# Altium PCB PCB1.PcbDoc
Units mm, origin at the board's own origin, x right, y up, seen from the top; angles counter-clockwise.
Board outline 100 x 100 mm, 2 copper layers (Top Layer, Bottom Layer); 23 components, 23 nets, 154 pads, 0 vias.
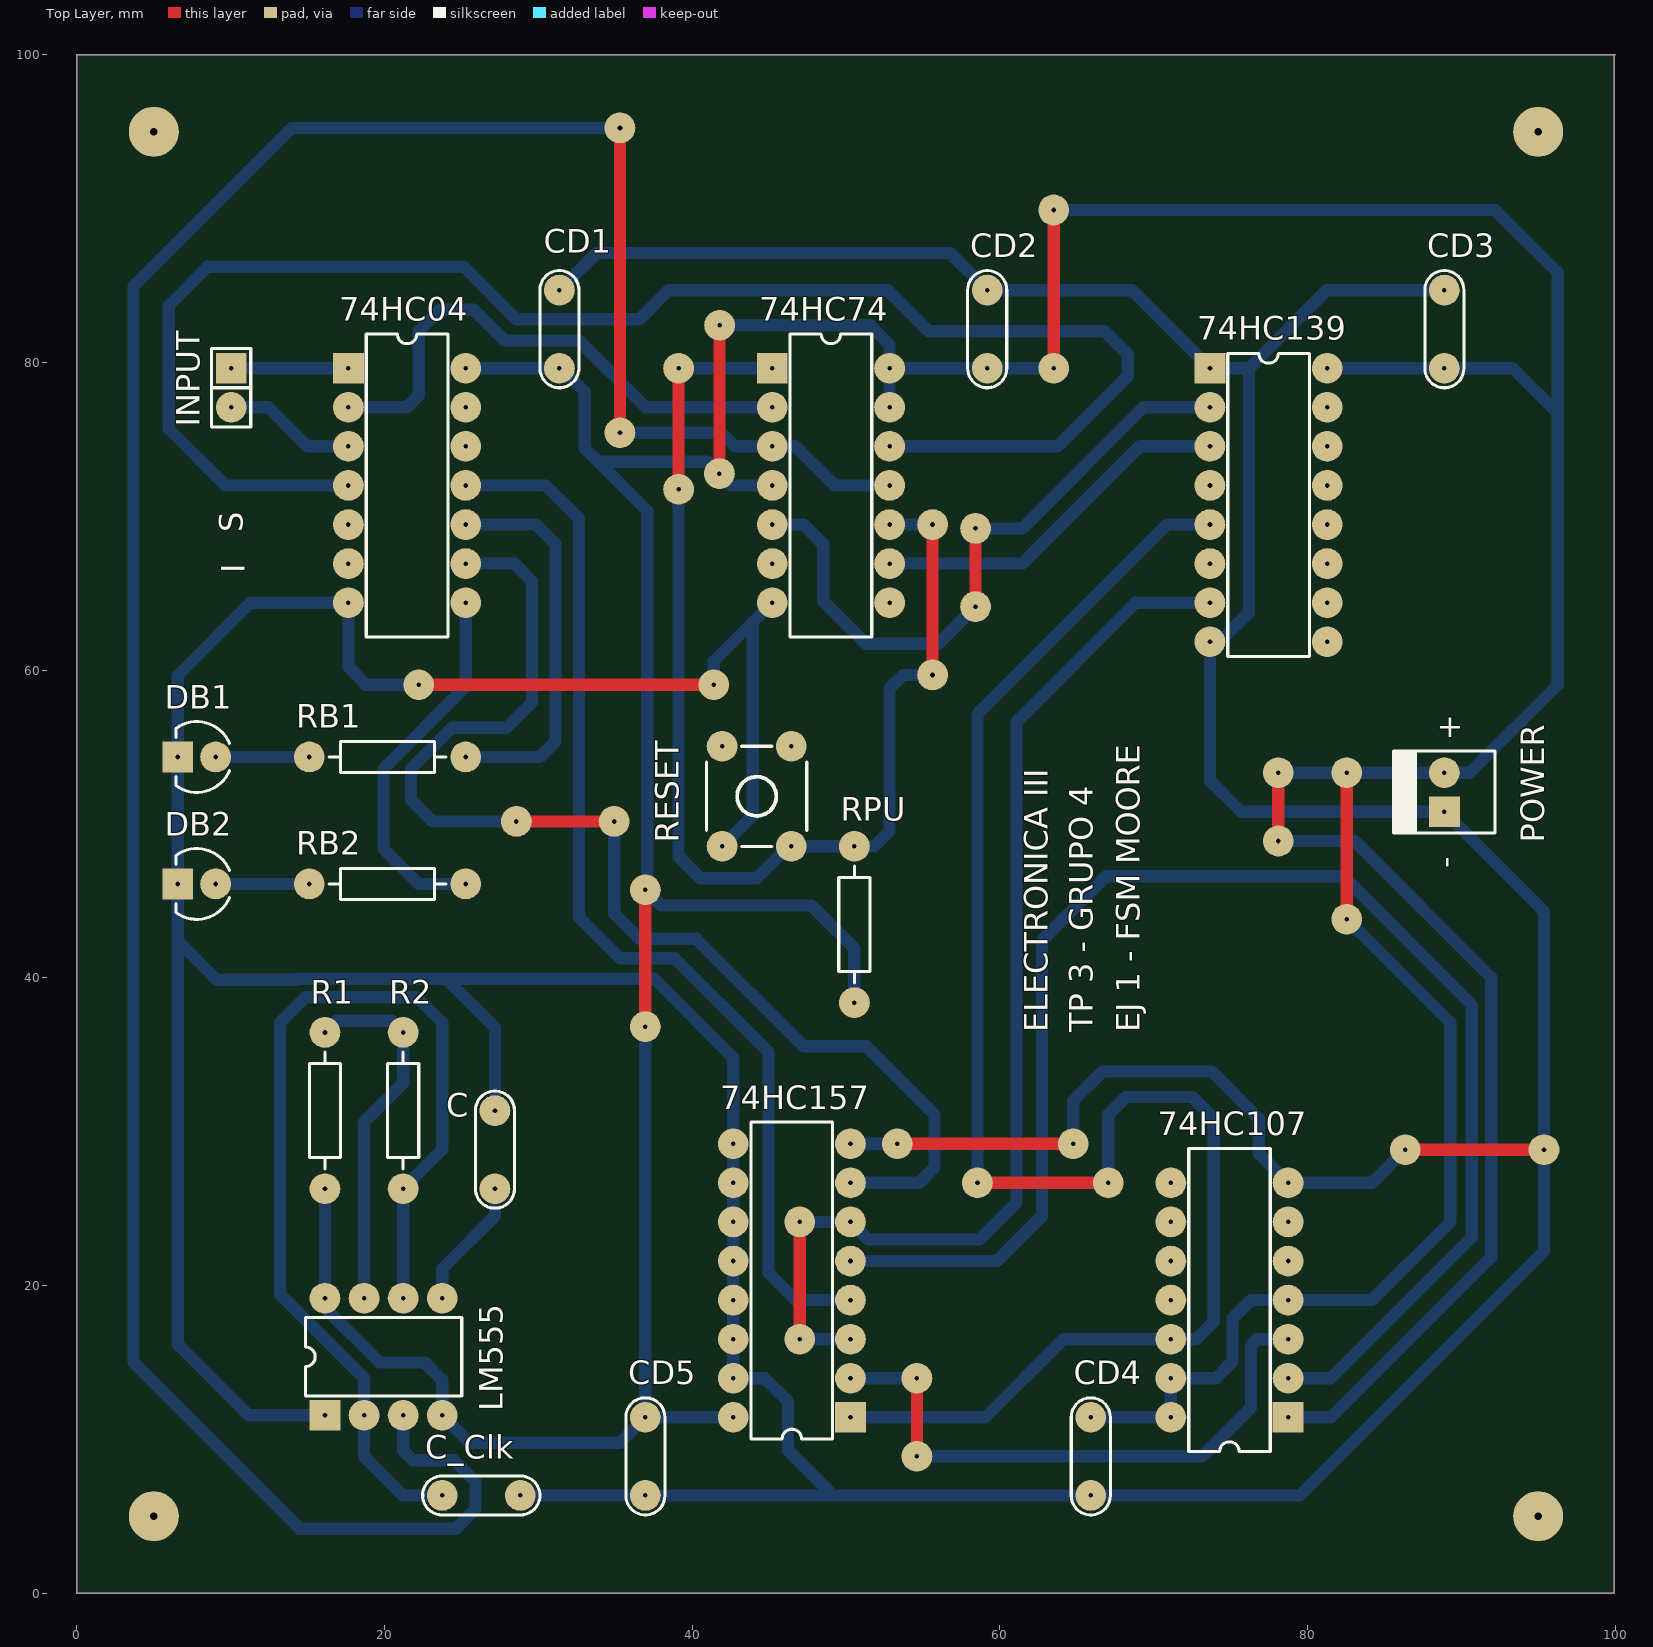
[diagram p0: Top Layer view]
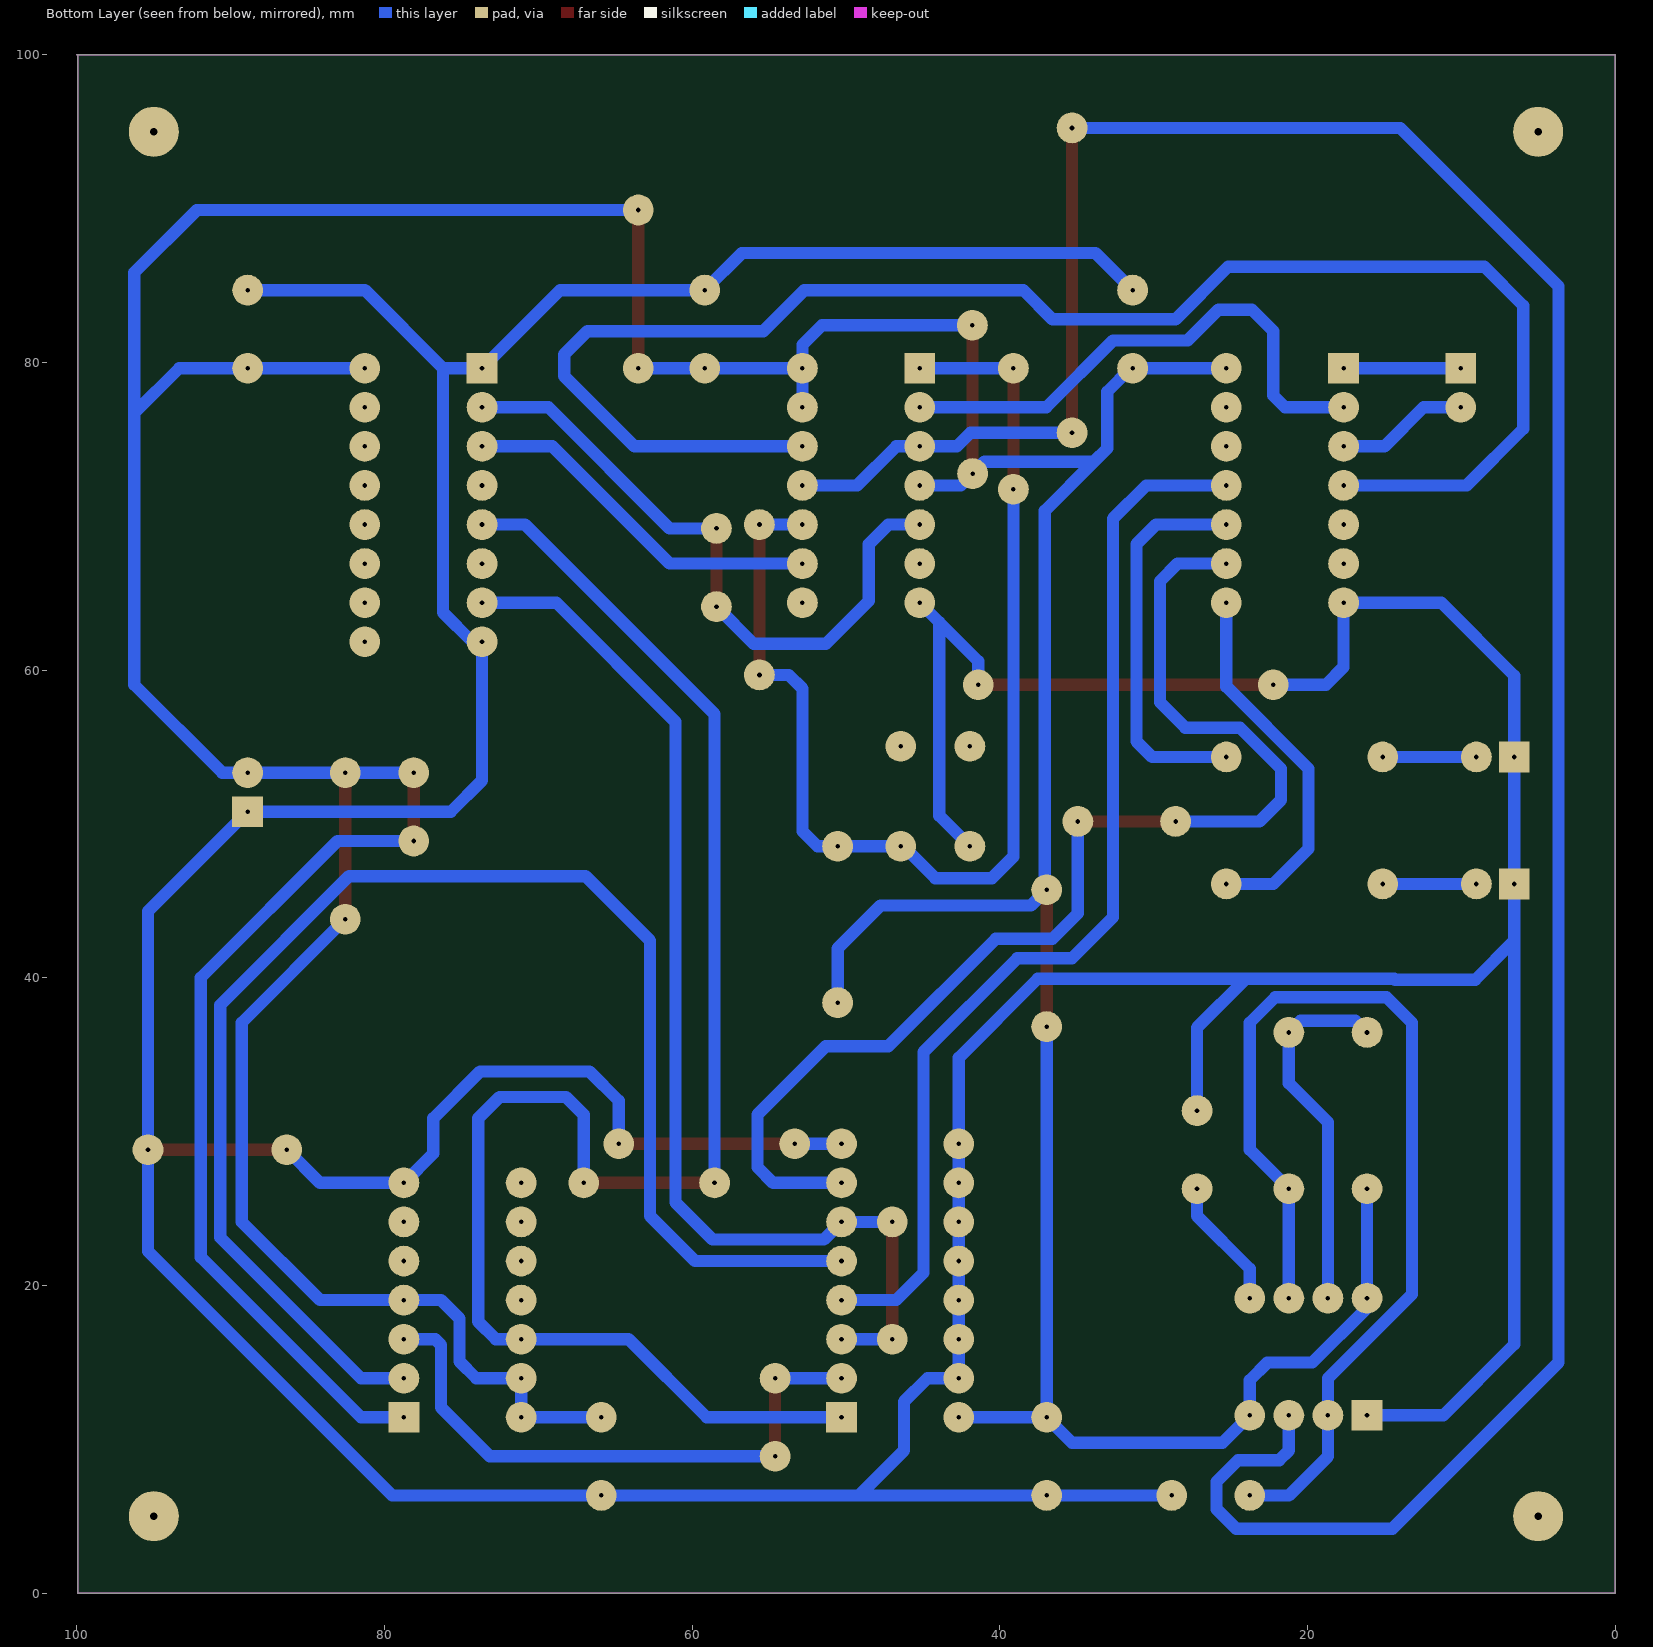
[diagram p1: Bottom Layer view, seen from below]
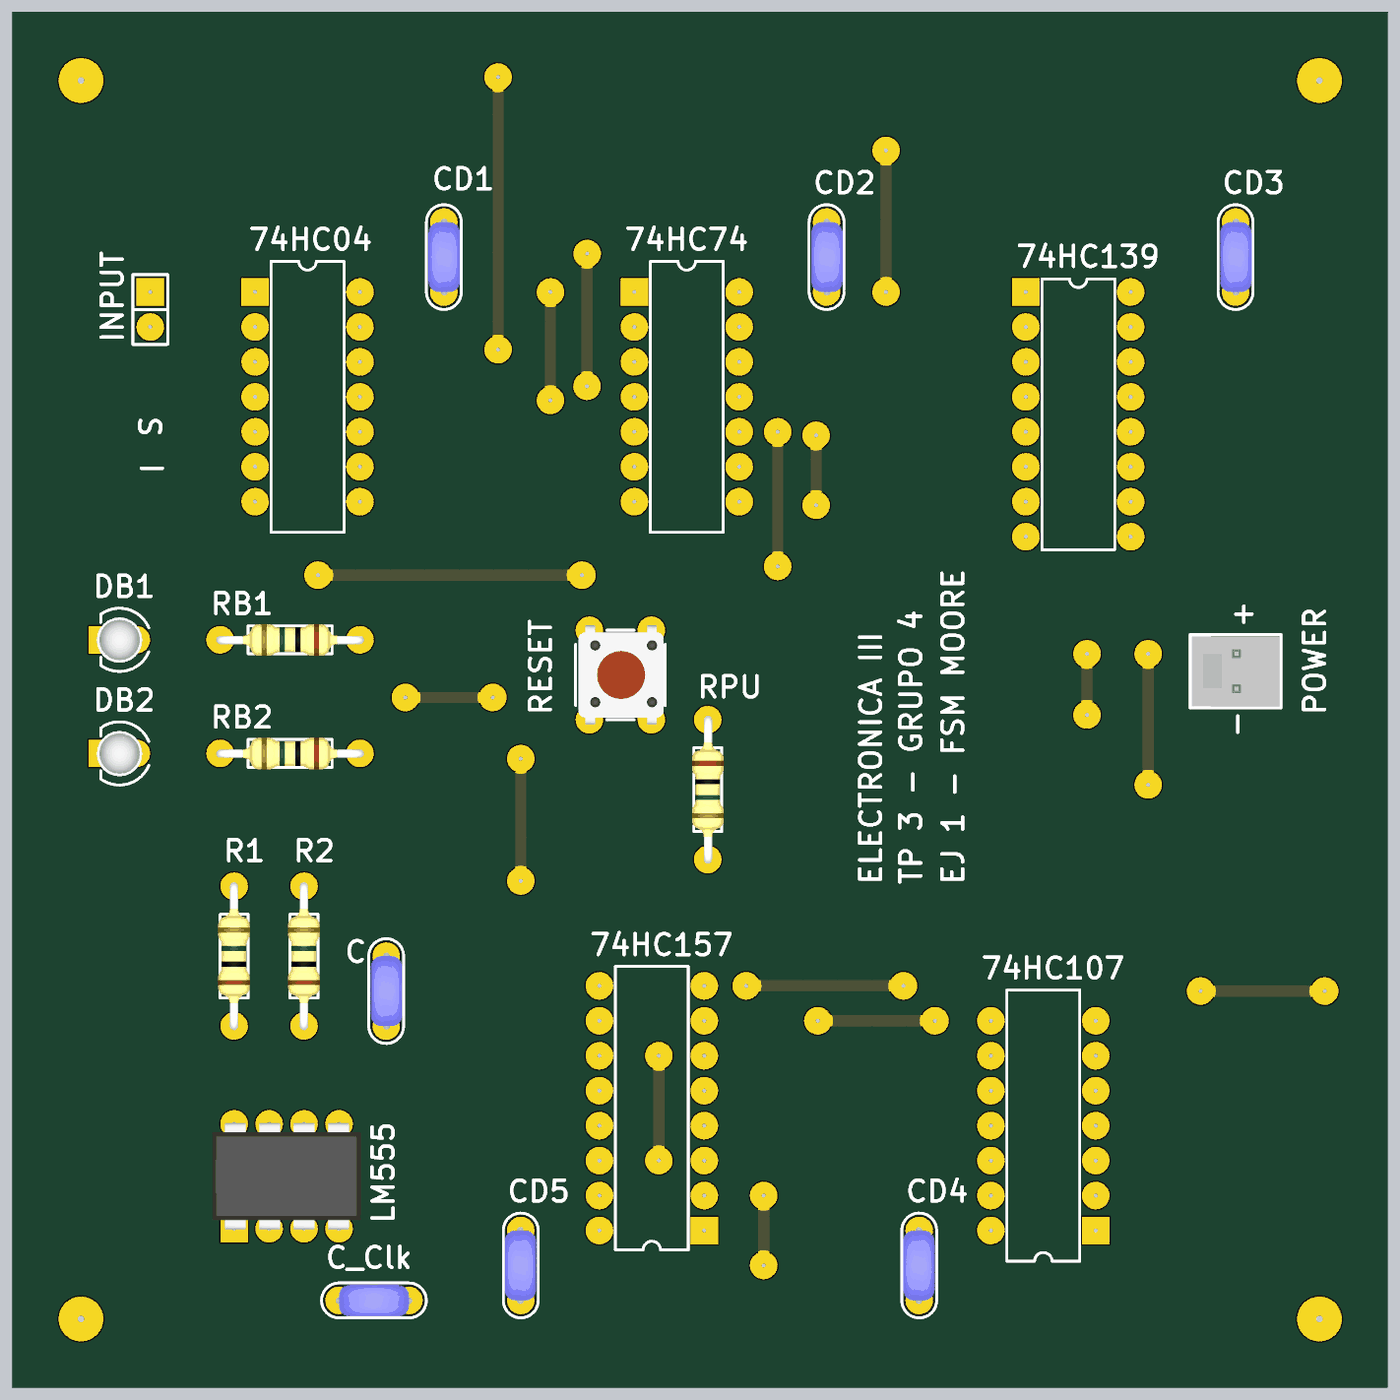
[diagram p2: 3D render of the assembled board from above, using the file's embedded part models]

## Layer stack, top to bottom
Top Solder: solder mask 0.0102, Solder Resist, Dk 3.5
Top Layer: signal copper 0.0356
Dielectric 1: dielectric 0.32, FR-4, Dk 4.8
Bottom Layer: signal copper 0.0356
Bottom Solder: solder mask 0.0102, Solder Resist, Dk 3.5

## Board outline
0,0 99.949,0 99.949,99.949 100,100 0,100

## Design rules (kind name [scope] priority, off if disabled: settings)
Clearance [All] p1: gap=0.4 ignorepadtopadclearanceinfootprint=FALSE
PolygonConnect [All] p1: connectstyle=Relief reliefconductorwidth=0.254 reliefentries=4 polygonreliefangle="90 Angle" airgapwidth=0.254
RoutingVias [All] p1: holewidth=0.3 width=2 viastyle="Through Hole" minholewidth=0.3 minwidth=1.5 maxholewidth=0.5 maxwidth=2
SolderMaskExpansion [All] p1: expansion=0.102
Width [All] p1: maxlimit=0.9 minlimit=0.6 preferedwidth=0.8
30 further rules are at their usual default settings.

## Components (designator, comment, footprint, x,y, rotation, side; value= is the part's Value field where it differs from the comment)
74HC04 "SN74AHC04N" N014 21.463,72.009 r270 top
74HC74 "SN74AHCT74N" N014 49.022,72.009 r270 top
74HC107 "SN74HC107N" N014D 74.93,19.05 r90 top
74HC139 "SN74HC139N" N016 77.47,70.739 r270 top
74HC157 "SN54HC157J" J016 46.482,20.32 r90 top
C "CAP" CAP200 27.178,28.829 r90 top
C_Clk "CAP" CAP200 26.289,6.35 r0 top
CD1 "CAP" CAP200 31.369,82.169 r90 top
CD2 "CAP" CAP200 59.182,82.169 r90 top
CD3 "CAP" CAP200 88.9,82.169 r90 top
CD4 "CAP" CAP200 65.913,8.89 r270 top
CD5 "CAP" CAP200 36.957,8.89 r270 top
DB1 "LED" LED3 7.798,54.356 r180 top
DB2 "LED" LED3 7.798,46.101 r180 top
INPUT "CON2" SIP2 10.033,78.359 r270 top
LM555 "LM555" DIP8 16.129,11.557 r90 top
POWER "MOLEX2" MOLEX2 88.9,50.8 r90 top
R1 "RES" RES400 16.129,26.289 r90 top
R2 "RES" RES400 21.209,26.289 r90 top
RB1 "RES" RES400 25.273,54.356 r180 top
RB2 "RES" RES400 25.273,46.101 r180 top
RESET "TACT SWITCH" TACTSWITCH 44.196,51.8 r0 top
RPU "RES" RES400 50.546,48.55 r270 top

## Footprints (in the part's own frame and the unit in brackets; to place one, negate y for a bottom-side part, rotate by r counter-clockwise, add the part's x,y. Pads: shape width x height; smd on the part's side, far side on the other; paste and mask are expansions set on the pad)
CAP200 [mm]
  round 2 hole 0.3: 1(-2.54,0) 2(2.54,0)
  silkscreen extent -3.81,-1.27 3.81,1.27, body extent -2.79,-1.17 2.79,1.12, height 6.24
DIP8 [mm]
  rect 2x2 hole 0.3: 1(0,0)
  round 2 hole 0.3: 2(0,-2.54) 3(0,-5.08) 4(0,-7.62) 5(7.62,-7.62) 6(7.62,-5.08) 7(7.62,-2.54) 8(7.62,0)
  silkscreen extent 1.27,-8.89 6.35,1.27, body extent -0.06,-9.21 7.7,1.59, height 4.5
J016 [mm] "DIP; 16 Leads; Row Spacing 7.62 mm; Pitch 2.54 mm"
  rect 2x2 hole 0.3: 1(-8.89,-3.81)
  round 2 hole 0.3: 2(-6.35,-3.81) 3(-3.81,-3.81) 4(-1.27,-3.81) 5(1.27,-3.81) 6(3.81,-3.81) 7(6.35,-3.81) 8(8.89,-3.81) 9(8.89,3.81) 10(6.35,3.81) 11(3.81,3.81) 12(1.27,3.81) 13(-1.27,3.81) 14(-3.81,3.81) 15(-6.35,3.81) 16(-8.89,3.81)
  silkscreen extent -10.3,-2.65 10.3,2.65
LED3 [mm]
  round 2 hole 0.3: 1(-1.219,0)
  rect 2x2 hole 0.3: 2(1.245,0)
  silkscreen extent -2.13,-2.3 1.36,2.3, body extent -1.65,-1.63 1.65,1.66, height 0.49
MOLEX2 [mm]
  rect 2x2 hole 0.3: 1(0,0)
  round 2 hole 0.3: 2(2.54,0)
  silkscreen extent -1.4,-3.3 3.94,3.3, body extent -1.27,-3.17 3.81,3.18, height 10.74
N014 [mm] "DIP; 14 Leads; Row Spacing 7.62 mm; Pitch 2.54 mm"
  rect 2x2 hole 0.3: 1(-7.62,-3.81)
  round 2 hole 0.3: 2(-5.08,-3.81) 3(-2.54,-3.81) 4(0,-3.81) 5(2.54,-3.81) 6(5.08,-3.81) 7(7.62,-3.81) 8(7.62,3.81) 9(5.08,3.81) 10(2.54,3.81) 11(0,3.81) 12(-2.54,3.81) 13(-5.08,3.81) 14(-7.62,3.81)
  silkscreen extent -9.85,-2.65 9.85,2.65
N014D [mm] "DIP; 14 Leads; Row Spacing 7.62 mm; Pitch 2.54 mm"
  rect 2x2 hole 0.3: 1(-7.62,-3.81)
  round 2 hole 0.3: 2(-5.08,-3.81) 3(-2.54,-3.81) 4(0,-3.81) 5(2.54,-3.81) 6(5.08,-3.81) 7(7.62,-3.81) 8(7.62,3.81) 9(5.08,3.81) 10(2.54,3.81) 11(0,3.81) 12(-2.54,3.81) 13(-5.08,3.81) 14(-7.62,3.81)
  silkscreen extent -9.85,-2.65 9.85,2.65
N016 [mm] "DIP; 16 Leads; Row Spacing 7.62 mm; Pitch 2.54 mm"
  rect 2x2 hole 0.3: 1(-8.89,-3.81)
  round 2 hole 0.3: 2(-6.35,-3.81) 3(-3.81,-3.81) 4(-1.27,-3.81) 5(1.27,-3.81) 6(3.81,-3.81) 7(6.35,-3.81) 8(8.89,-3.81) 9(8.89,3.81) 10(6.35,3.81) 11(3.81,3.81) 12(1.27,3.81) 13(-1.27,3.81) 14(-3.81,3.81) 15(-6.35,3.81) 16(-8.89,3.81)
  silkscreen extent -9.85,-2.65 9.85,2.65
RES400 [mm]
  round 2 hole 0.3: 1(0,0) 2(10.16,0)
  silkscreen extent 1.27,-1.02 8.89,1.02, body extent -0.3,-1.14 10.46,1.17, height 2.43
SIP2 [mm]
  rect 2x2 hole 0.3: 1(-1.27,0)
  round 2 hole 0.3: 2(1.27,0)
  silkscreen extent -2.54,-1.27 2.54,1.27
TACTSWITCH [mm]
  round 2 hole 0.3: 1(-2.25,-3.25) 2(-2.25,3.25) 3(2.25,-3.25) 4(2.25,3.25)
  silkscreen extent -3.25,-3.25 3.25,3.25, body extent -3.05,-3.95 3.15,3.95, height 7

## Part data
74HC04: "Hex Inverter", ComponentLink1Description="Manufacturer Link", ComponentLink1URL=http://www.ti.com/, ComponentLink2Description=Datasheet, ComponentLink2URL=http://www-s.ti.com/sc/ds/sn74ahc04.pdf, ComponentLink3Description="Packaging Specification", ComponentLink3URL=http://focus.ti.com/lit/ml/mpdi002c/mpdi002c.pdf, DatasheetVersion=Jun-1998, LatestRevisionDate=04-Mar-2005, LatestRevisionNote="Stylized 3D Model Added.", PackageDescription="DIP; 14 Leads; Row Spacing 7.62 mm; Pitch 2.54 mm", PackageReference=N014, PackageVersion=Oct-1995, Published=8-Jun-2000, Publisher="Altium Limited"
74HC74: "Dual Positive-Edge-Triggered D-Type Flip-Flop with Clear and Preset", ComponentLink1Description="Manufacturer Link", ComponentLink1URL=http://www.ti.com/, ComponentLink2Description=Datasheet, ComponentLink2URL=http://www-s.ti.com/sc/ds/sn74ahct74.pdf, DatasheetVersion=Oct-1998, LatestRevisionDate=04-Mar-2005, LatestRevisionNote="Stylized 3D Model Added.", PackageDescription="DIP; 14 Leads; Row Spacing 7.62 mm; Pitch 2.54 mm", PackageReference=N014, PackageVersion=Oct-1995, Published=8-Jun-2000, Publisher="Altium Limited"
74HC107: "Dual J-K Negative-Edge-Triggered Flip-Flop with Clear", ComponentLink1Description="Manufacturer Link", ComponentLink1URL=http://www.ti.com/, DatasheetVersion=Jun-1989, LatestRevisionDate=04-Mar-2005, LatestRevisionNote="Stylized 3D Model Added.", PackageDescription="DIP; 14 Leads; Row Spacing 7.62 mm; Pitch 2.54 mm", PackageReference=N014D, PackageVersion=Oct-1995, Published=8-Jun-2000, Publisher="Altium Limited"
74HC139: "Dual 2-Line to 4-Line Decoder / Demultiplexer", Code_JEDEC=MS-001-BB, ComponentLink1Description="Manufacturer Link", ComponentLink1URL=http://www.ti.com/, ComponentLink2Description=Datasheet, ComponentLink2URL=http://www-s.ti.com/sc/ds/sn74hc139.pdf, DatasheetVersion=May-1997, LatestRevisionDate=04-Mar-2005, LatestRevisionNote="Stylized 3D Model Added.", PackageDescription="DIP; 16 Leads; Row Spacing 7.62 mm; Pitch 2.54 mm", PackageReference=N016, PackageVersion=Oct-1995, Published=8-Jun-2000, Publisher="Altium Limited"
74HC157: "Quadraple 2-Line to 1-Line Data Selector/Multiplexer", ComponentLink1Description="Manufacturer Link", ComponentLink1URL=http://www.ti.com/, ComponentLink2Description=Datasheet, ComponentLink2URL=http://www-s.ti.com/sc/ds/sn74hc157.pdf, DatasheetVersion=May-1997, LatestRevisionDate=04-Mar-2005, LatestRevisionNote="Stylized 3D Model Added.", PackageDescription="DIP; 16 Leads; Row Spacing 7.62 mm; Pitch 2.54 mm", PackageReference=J016, PackageVersion=Jun-1999, Published=8-Jun-2000, Publisher="Altium Limited"
LM555: "Timer"

## Free pads (board coordinates)
  round 3.25 hole 0.5: 10(5,5) 11(95,5) 12(95,95) 13(5,95)
  round 2 hole 0.3: 27(58.42,64.135) 28(58.42,69.215) 31(35.306,95.25) 32(35.306,75.438) 35(54.61,13.97) 36(54.61,8.89) 37(64.77,29.21) 38(53.34,29.21) 39(63.5,89.916) 40(63.5,79.629) 41(41.402,59.055) 42(22.225,59.055) 43(58.547,26.67) 44(67.056,26.67) 45(82.55,53.34) 46(82.55,43.815) 49(86.36,28.829) 50(95.377,28.829) 51(46.99,24.13) 52(46.99,16.51) 53(78.105,53.34) 54(78.105,48.895) 55(36.957,36.83) 56(36.957,45.72) 58(55.626,69.469) 59(55.626,59.69) 60(39.116,71.755) 61(39.116,79.629) 62(41.772,72.782) 63(41.783,82.423) 64(34.925,50.165) 65(28.575,50.165)

## Nets (pads, with @x,y where several pads share a name; then routed paths per layer and width w, separated by ;. In a path a pad name is that pad's centre, name@x,y a point inside that pad or via, vN(x,y) a via of type N, cw(c..) or ccw(c..) an arc to the next point about the centre after c; other vN are vias at no path point)
Ambos: 74HC139.7 74HC157.3 74HC157.6 pad.51 pad.52 | length 73.5
  Top Layer w0.8: pad.52 pad.51
  Bottom Layer w0.8: pad.52 74HC157.3 ; pad.51 74HC157.6 50.298,24.13 51.441,22.987 58.674,22.987 61.087,25.4 61.087,56.642 68.834,64.389 74HC139.7
b1: 74HC04.10 RB1.1 | length 25.5
  Bottom Layer w0.8: RB1.1 30.099,54.356 31.115,55.372 31.115,68.199 29.845,69.469 74HC04.10
b2: 74HC04.8 RB2.1 | length 24.5
  Bottom Layer w0.8: RB2.1 22.225,46.101 19.939,48.387 19.939,53.594 25.273,58.928 74HC04.8
Clear: 74HC74.1 74HC74.10 pad.58 pad.59 pad.60 pad.61 RESET.3 RPU.1 | length 78.4
  Top Layer w0.8: pad.60 pad.61 ; pad.59 pad.58
  Bottom Layer w0.8: pad.60 39.116,47.879 40.513,46.482 44.196,46.482 46.264,48.55 RESET.3 RPU.1 51.852,48.55 52.832,49.53 52.832,58.801 53.721,59.69 pad.59 ; pad.61 74HC74.1 ; 74HC74.10 pad.58
Clk: 74HC74.3 74HC74.11 LM555.3 pad.31 pad.32 | length 181.4
  Top Layer w0.8: pad.32 pad.31
  Bottom Layer w0.8: LM555.3 21.209,9.271 21.844,8.636 24.511,8.636 25.908,7.239 25.908,5.461 24.638,4.191 14.478,4.191 3.683,14.986 3.683,84.963 13.97,95.25 pad.31 ; pad.32 41.91,75.438 42.799,74.549 74HC74.3 46.736,74.549 49.276,72.009 74HC74.11
GND: 74HC04.7 74HC74.7 74HC107.7 74HC139.1 74HC139.8 74HC157.8 74HC157.9 74HC157.10 74HC157.11 74HC157.12 74HC157.13 74HC157.14 74HC157.15 C.2 C_Clk.2 CD1.2 CD2.2 CD3.2 CD4.2 CD5.2 DB1.2 DB2.2 LM555.1 pad.37 pad.38 pad.41 pad.42 pad.49 pad.50 POWER.1 RESET.1 | length 466.6
  Top Layer w0.8: pad.42 pad.41 ; pad.38 pad.37 ; pad.49 pad.50
  Bottom Layer w0.8: LM555.1 11.176,11.557 6.553,16.18 6.553,42.418 ; pad.42 18.796,59.055 17.653,60.198 74HC04.7 11.303,64.389 6.553,59.639 DB1.2 DB2.2 6.553,42.418 ; C.2 27.178,36.76 24.003,39.935 ; C_Clk.2 CD5.2 49.149,6.35 ; CD1.2 33.782,87.122 56.769,87.122 CD2.2 68.58,84.709 74HC139.1 76.2,79.629 ; pad.41 41.402,60.579 43.942,63.119 ; RESET.1 43.942,50.546 43.942,63.119 ; 74HC74.7 43.942,63.119 ; 74HC157.8 pad.38 ; pad.37 64.77,32.004 66.675,33.909 73.787,33.909 76.835,30.861 76.835,28.575 74HC107.7 84.201,26.67 pad.49 ; CD3.2 81.28,84.709 76.2,79.629 ; POWER.1@88.906,50.8 POWER.1 ; 6.553,42.418 9.093,39.878 14.305,39.878 14.362,39.935 24.003,39.935 ; 24.003,39.935 37.535,39.935 42.672,34.798 74HC157.9 74HC157.10 74HC157.11 74HC157.12 74HC157.13 74HC157.14 74HC157.15 44.704,13.97 46.228,12.446 46.228,9.271 49.149,6.35 ; 49.149,6.35 CD4.2 79.502,6.35 95.377,22.225 pad.50 95.377,44.323 POWER.1 ; 76.2,79.629 76.2,63.754 74.295,61.849 74HC139.8 73.66,52.832 75.692,50.8 POWER.1
Net74HC04_2: 74HC04.2 74HC74.2 | length 35.3
  Bottom Layer w0.8: 74HC04.2 21.463,77.089 22.225,77.851 22.225,82.042 23.622,83.439 25.781,83.439 27.791,81.429 32.639,81.429 36.979,77.089 74HC74.2
Net74HC04_4: 74HC04.4 74HC74.12 | length 107.3
  Bottom Layer w0.8: 74HC04.4 9.652,72.009 5.969,75.692 5.969,83.693 8.509,86.233 25.146,86.233 28.575,82.804 36.576,82.804 38.481,84.709 52.705,84.709 55.372,82.042 66.802,82.042 68.326,80.518 68.326,79.121 63.754,74.549 74HC74.12
Net74HC04_9: 74HC04.9 74HC157.7 pad.64 pad.65 | length 79.7
  Top Layer w0.8: pad.65 pad.64
  Bottom Layer w0.8: 74HC04.9 28.448,66.929 29.591,65.786 29.591,57.912 27.94,56.261 24.384,56.261 21.717,53.594 21.717,51.562 23.114,50.165 pad.65 ; pad.64 34.925,44.196 36.576,42.545 40.259,42.545 47.244,35.56 51.308,35.56 55.753,31.115 55.753,27.686 54.737,26.67 74HC157.7
Net74HC04_11: 74HC04.11 74HC157.4 | length 70.5
  Bottom Layer w0.8: 74HC04.11 30.48,72.009 32.639,69.85 32.639,43.942 35.306,41.275 38.862,41.275 44.958,35.179 44.958,20.828 46.736,19.05 74HC157.4
Net74HC74_5: 74HC74.5 74HC139.2 pad.27 pad.28 | length 43.2
  Top Layer w0.8: pad.27 pad.28
  Bottom Layer w0.8: 74HC74.5 47.244,69.469 48.514,68.199 48.514,64.516 51.308,61.722 56.007,61.722 pad.27 ; pad.28 61.468,69.215 69.342,77.089 74HC139.2
Net74HC74_9: 74HC74.9 74HC139.3 | length 24
  Bottom Layer w0.8: 74HC74.9 61.468,66.929 69.088,74.549 74HC139.3
NetC_1: C.1 LM555.5 | length 8.5
  Bottom Layer w0.8: LM555.5 23.749,21.082 27.178,24.511 C.1
NetC_Clk_1: C_Clk.1 LM555.2 LM555.6 R2.1 | length 67.5
  Bottom Layer w0.8: LM555.6 R2.1 23.749,28.829 23.749,37.084 22.098,38.735 14.859,38.735 13.208,37.084 13.208,19.431 18.669,13.97 LM555.2 18.669,8.89 21.209,6.35 C_Clk.1
NetDB1_1: DB1.1 RB1.2 | length 6.1
  Bottom Layer w0.8: DB1.1 RB1.2
NetDB2_1: DB2.1 RB2.2 | length 6.1
  Bottom Layer w0.8: DB2.1 RB2.2
NetLM555_7: LM555.7 R1.2 R2.2 | length 24
  Bottom Layer w0.8: R1.2 16.891,37.211 20.447,37.211 R2.2 21.209,33.147 18.669,30.607 LM555.7
nQT: 74HC107.2 74HC157.5 | length 95.6
  Bottom Layer w0.8: 74HC157.5 59.817,21.59 62.738,24.511 62.738,42.418 66.929,46.609 82.302,46.609 90.678,38.233 90.678,23.114 81.534,13.97 74HC107.2
QT: 74HC107.3 74HC157.2 pad.35 pad.36 | length 39.1
  Top Layer w0.8: pad.36 pad.35
  Bottom Layer w0.8: 74HC157.2 pad.35 ; pad.36 73.152,8.89 76.327,12.065 76.327,16.129 76.708,16.51 74HC107.3
Uno_solo: 74HC107.12 74HC139.5 74HC157.1 pad.43 pad.44 | length 111
  Top Layer w0.8: pad.43 pad.44
  Bottom Layer w0.8: 74HC157.1 59.055,11.43 64.135,16.51 74HC107.12 72.771,16.51 73.914,17.653 73.914,30.861 72.517,32.258 68.199,32.258 67.056,31.115 pad.44 ; pad.43 58.547,57.15 70.866,69.469 74HC139.5
VCC: 74HC04.14 74HC74.4 74HC74.13 74HC74.14 74HC107.1 74HC107.4 74HC107.13 74HC107.14 74HC139.16 74HC157.16 CD1.1 CD2.1 CD3.1 CD4.1 CD5.1 LM555.4 LM555.8 pad.39 pad.40 pad.45 pad.46 pad.53 pad.54 pad.55 pad.56 pad.62 pad.63 POWER.2 R1.1 RPU.2 | length 413
  Top Layer w0.8: pad.55 pad.56 ; pad.62 41.772,82.412 pad.63 ; pad.40 pad.39 ; pad.54 pad.53 ; pad.46 pad.45
  Bottom Layer w0.8: R1.1 LM555.8 16.129,18.542 19.685,14.986 22.606,14.986 23.749,13.843 LM555.4 25.527,9.779 35.306,9.779 CD5.1 ; 74HC04.14 CD1.1 31.496,79.629 33.02,78.105 33.02,74.422 33.887,73.555 ; pad.55 CD5.1 ; pad.63 51.562,82.423 52.832,81.153 74HC74.14 ; 74HC157.16 CD5.1 ; 74HC74.4 42.545,72.009 pad.62 40.999,73.555 33.887,73.555 ; RPU.2 50.546,41.91 47.752,44.704 37.973,44.704 pad.56 37.084,45.847 37.084,70.358 33.887,73.555 ; 74HC74.13 74HC74.14 ; pad.40 CD2.1 74HC74.14 ; pad.39 92.202,89.916 96.266,85.852 96.266,76.708 ; CD4.1 74HC107.14 74HC107.13 74.041,13.97 75.127,15.056 75.127,17.85 76.327,19.05 74HC107.4 84.201,19.05 89.281,24.13 89.281,37.084 pad.46 ; pad.54 83.058,48.895 91.948,40.005 91.948,21.844 81.534,11.43 74HC107.1 ; pad.53 pad.45 POWER.2 90.551,53.34 96.266,59.055 96.266,76.708 ; 74HC139.16 CD3.1 93.345,79.629 96.266,76.708
w0: 74HC04.3 INPUT.2 | length 8.7
  Bottom Layer w0.8: INPUT.2 12.446,77.089 14.986,74.549 74HC04.3
w1: 74HC04.1 INPUT.1 | length 7.6
  Bottom Layer w0.8: INPUT.1 74HC04.1
pads on no net: 74HC04.5 74HC04.6 74HC04.12 74HC04.13 74HC74.6 74HC74.8 74HC107.5 74HC107.6 74HC107.8 74HC107.9 74HC107.10 74HC107.11 74HC139.4 74HC139.6 74HC139.9 74HC139.10 74HC139.11 74HC139.12 74HC139.13 74HC139.14 74HC139.15 RESET.2 RESET.4

## Keep-outs
Keep-Out Layer:
  the board outline again, w0.1

## Silkscreen, mask and mechanical layers (free items; w line width, h text height)
Top Overlay:
  text "S" at 10.795,68.961 h1.52 r90
  text "I" at 10.922,66.294 h1.52 r90
  text "+" at 88.392,55.626 h1.52
  text "-" at 89.662,47.117 h1.52 r90
  text "ELECTRONICA III" at 63.119,36.449 h1.52 r90
  text "TP 3 - GRUPO 4" at 66.04,36.449 h1.52 r90
  text "EJ 1 - FSM MOORE" at 69.088,36.449 h1.52 r90